# Altium PCB Battery protector.PcbDoc
Units mm, origin at the board's own origin, x right, y up, seen from the top; angles counter-clockwise.
Board outline 17.78 x 31.75 mm, 2 copper layers (Top Layer, Bottom Layer); 9 components, 8 nets, 46 pads, 43 vias.
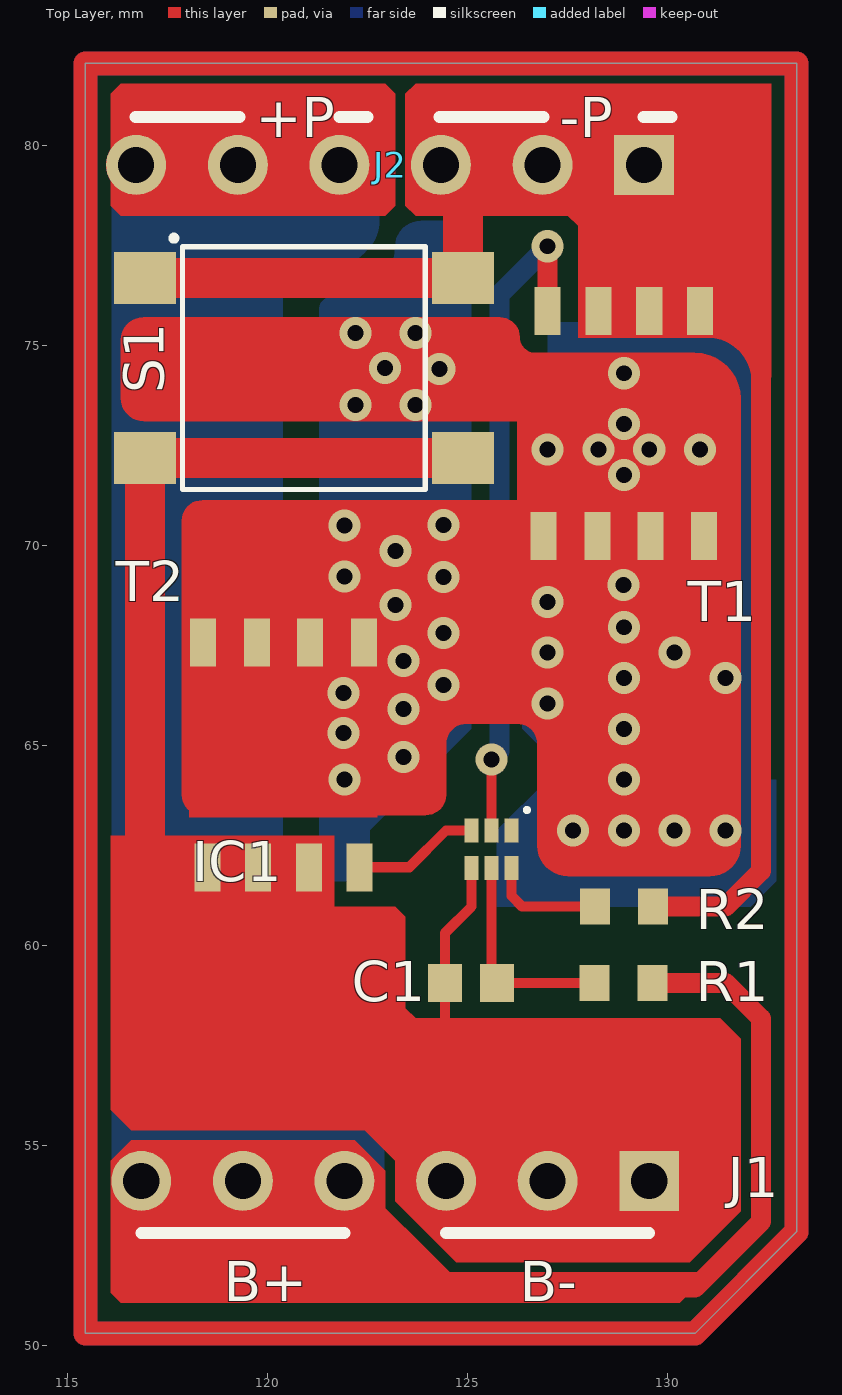
[diagram p0: Top Layer view]
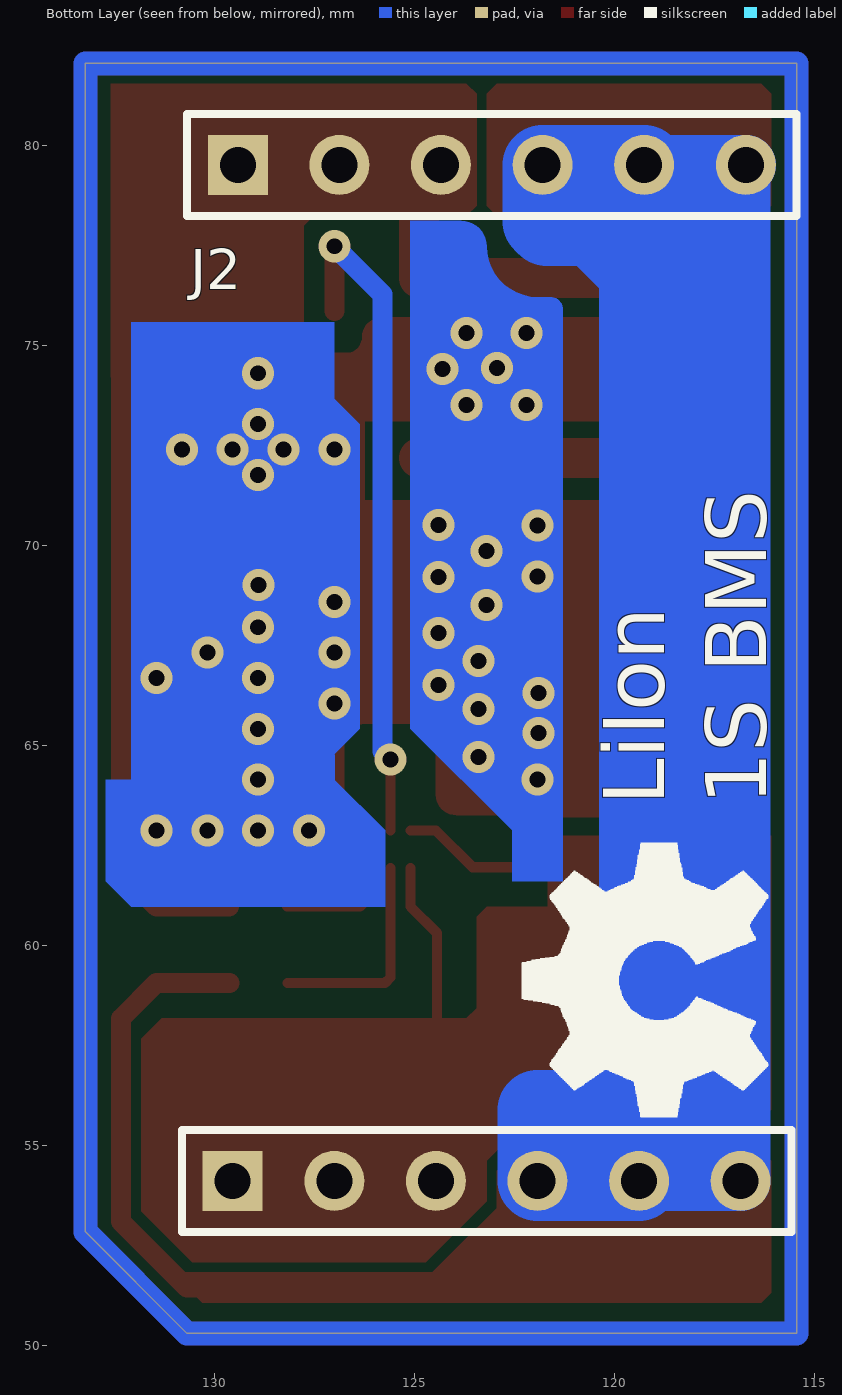
[diagram p1: Bottom Layer view, seen from below]
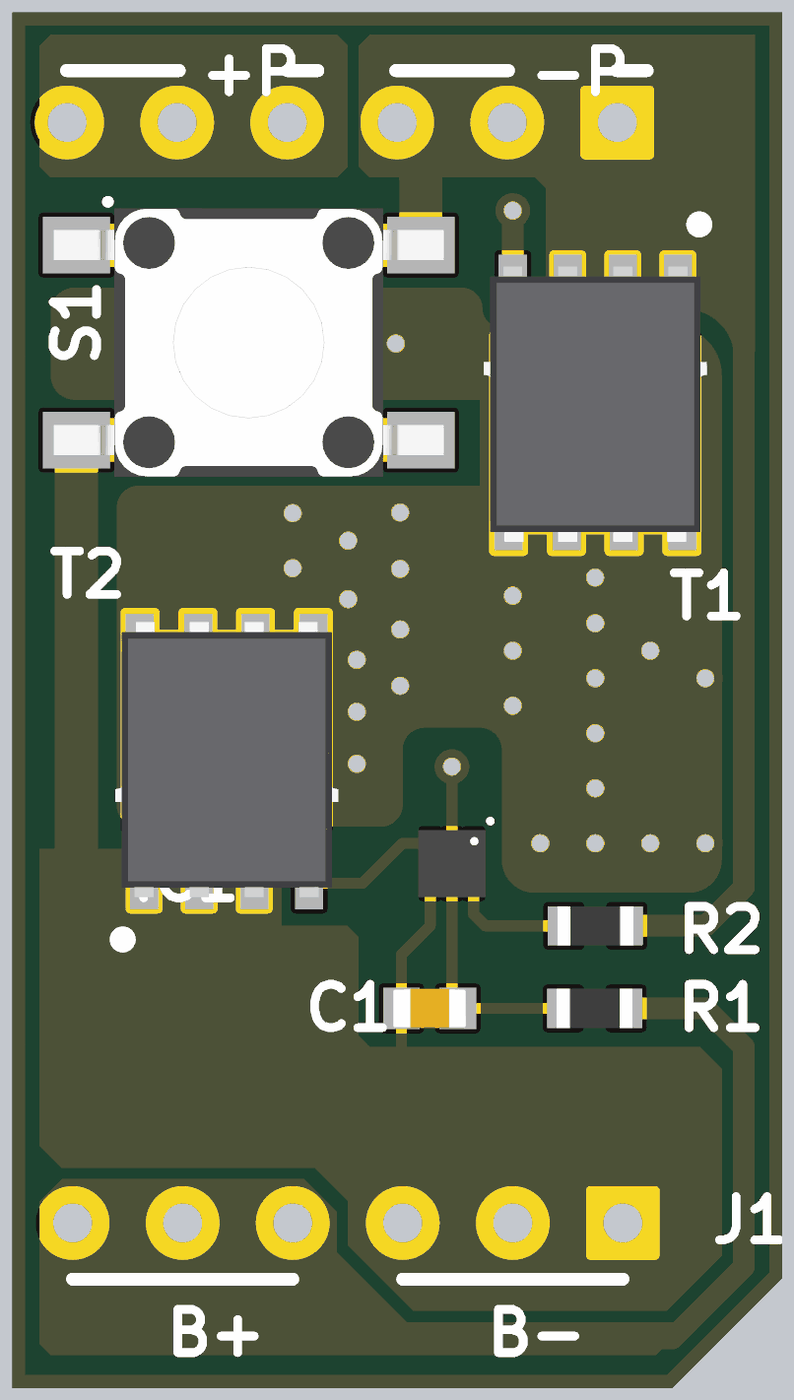
[diagram p2: 3D render of the assembled board from above, using the file's embedded part models]

## Layer stack, top to bottom
Top Solder: solder mask 0.0102, Solder Resist, Dk 3.5
Top Layer: signal copper 0.0356
Dielectric 1: dielectric 0.32, FR-4, Dk 4.8
Bottom Layer: signal copper 0.0356
Bottom Solder: solder mask 0.0102, Solder Resist, Dk 3.5

## Board outline
115.443,50.292 130.683,50.292 133.223,52.832 133.223,82.042 115.443,82.042

## Design rules (kind name [scope] priority, off if disabled: settings)
Clearance [All] p1: gap=0.2 ignorepadtopadclearanceinfootprint=FALSE
PolygonConnect [All] p1: connectstyle=Relief reliefconductorwidth=0.254 reliefentries=4 polygonreliefangle="90 Angle" airgapwidth=0.254
RoutingVias [All] p1: holewidth=0.4 width=0.8 viastyle="Through Hole" minholewidth=0.3 minwidth=0.6 maxholewidth=0.711 maxwidth=3
SolderMaskExpansion [All] p1: expansion=0.102
Width [All] p1: maxlimit=10 minlimit=0.2 preferedwidth=0.254 minimp=50.000000 maximp=50.000000 favimp=50.000000
30 further rules are at their usual default settings.

## Components (designator, comment, footprint, x,y, rotation, side; value= is the part's Value field where it differs from the comment)
C1 "Capacitor" "0603 cap" 125.08,59.055 r0 top
IC1 "BQ2970" PWSON-6 125.595,62.395 r270 top
J1 "Protect_IN" HDR1X6 129.54,54.102 r180 top
J2 "Protect_OUT" HDR1X6 129.413,79.502 r180 top
R1 "Resistor generic" "0603 RES" 128.89,59.055 r0 top
R2 "Resistor generic" "0603 RES" 128.905,60.96 r180 top
S1 "430152043826" 4301x20438x6 120.904,74.422 r0 top
T1 "MOSFET-N" TDSON-8 128.905,73.025 r180 top
T2 "MOSFET-N" TDSON-8 120.396,64.77 r0 top

## Footprints (in the part's own frame and the unit in brackets; to place one, negate y for a bottom-side part, rotate by r counter-clockwise, add the part's x,y. Pads: shape width x height; smd on the part's side, far side on the other; paste and mask are expansions set on the pad)
"0603 cap" [mm]
  rect 0.85x0.95 smd: 1(-0.65,0) 2(0.65,0)
  body extent -0.85,-0.45 0.85,0.45, height 0.8
"0603 RES" [mm] "RES0603 medium"
  rect 0.75x0.9 smd: 1(-0.725,0) 2(0.725,0)
  body extent -0.87,-0.45 0.87,0.45, height 0.4
4301x20438x6 [mm] "6*6mm vertical type, SMD, height 4.3mm, black actuator, 160gf, T&R"
  rect 1.55x1.3 smd: 1(-3.975,2.25) 2(-3.975,-2.25) 3(3.975,2.25) 4(3.975,-2.25)
  silkscreen extent -3.29,-3.04 3.04,3.29, body extent -4.5,-3.1 4.5,3.1, height 4.29
HDR1X6 [mm] "Connector; Header; 6 Position"
  rect 1.5x1.5 hole 0.9: 1(0,0)
  round 1.5 hole 0.9: 2(2.54,0) 3(5.08,0) 4(7.62,0) 5(10.16,0) 6(12.7,0)
PWSON-6 [mm] "PSON, 6-Leads, Body 1,50x1,50mm, Pitch 0,50mm, IPC Medium Density"
  rect 0.6x0.35 smd: 1(-0.47,0.5) 2(-0.47,0) 3(-0.47,-0.5) 4(0.47,-0.5) 5(0.47,0) 6(0.47,0.5)
  silkscreen extent -1.03,0.84 -0.93,0.94, body extent -0.78,-0.77 0.78,0.77, height 0.8
TDSON-8 [mm] "Mosfet TDSON 8-pin"
  rect 0.65x1.2 smd: 1(-1.905,-2.825) 1(-0.635,-2.825) 1(0.635,-2.825) 2(1.905,-2.825) 3(-2.007,2.794) 3(-0.66,2.794) 3(0.66,2.794) 3(2.007,2.794)
  round 0.6 on Top Overlay: ""(-2.4,-4.125)
  Top Layer region: 0.315,2.925 1.015,2.925 1.015,3.425 0.315,3.425
  Top Layer region: -1.015,2.925 -0.315,2.925 -0.315,3.425 -1.015,3.425
  Top Layer region: 1.65,2.925 2.35,2.925 2.35,3.425 1.65,3.425
  Top Layer region: -2.35,2.925 -1.65,2.925 -1.65,3.425 -2.35,3.425
  Top Layer region: -2.35,2.925 -2.35,-1.575 2.35,-1.575 2.35,2.925
  body extent -2.58,-3.15 2.57,3.2, height 1.1

## Part data
C1: library part "Capacitor NP", Valve=100nF
IC1: "Battery protection IC"
J1 J2: library part "Header 6", "Header, 6-Pin", LatestRevisionDate=17-Jul-2002, LatestRevisionNote="Re-released for DXP Platform.", Publisher="Altium Limited"
R1 R2: library part Resistor, "Resistor SMD"
  R1: Valve=330
  R2: Valve=2k2
S1: library part "WS-TASV, 430152043826", "WS-TASV 6x6 mm SMD", Manufacturer="Wurth Elektronik", ComponentLink1Description=Manufacturer, ComponentLink1URL=http://www.we-online.de, ComponentLink2Description=Datasheet, ComponentLink2URL=http://katalog.we-online.de/em/datasheet/4301x2xxx8x6.pdf, Created by="Baojun Chen", Created Date=Dec.2015, partNo=430152043826
T1 T2: "MOSFET N", Valve=SI7157DP-T1-GE3

## Via types
v1: diameter 0.8, hole 0.4, Top Layer to Bottom Layer, tented both sides, 43 vias

## Nets (pads, with @x,y where several pads share a name; then routed paths per layer and width w, separated by ;. In a path a pad name is that pad's centre, name@x,y a point inside that pad or via, vN(x,y) a via of type N, cw(c..) or ccw(c..) an arc to the next point about the centre after c; other vN are vias at no path point)
COOL: T1.3 T2.3
  other v1: 127.635,62.865 128.905,62.865 130.175,62.865 131.445,62.865 121.92,64.135 128.905,64.135 123.4,64.7 121.9,65.3 128.905,65.405 123.4,65.9 127,66.04 121.9,66.3 124.4,66.5 128.905,66.675 131.445,66.675 123.4,67.1 127,67.31 130.175,67.31 124.4,67.8 128.905,67.945 123.2,68.5 127,68.58 128.9,69 124.4,69.2 121.92,69.215 123.2,69.85 121.92,70.485 124.4,70.5 128.905,71.755 127,72.39 128.27,72.39 129.54,72.39 130.81,72.39 128.905,73.025 122.2,73.5 123.7,73.5 128.905,74.295 124.3,74.4 122.928,74.422 122.2,75.3 123.7,75.3
GND_BAT: C1.1 IC1.4 J1.1 J1.2 J1.3 S1.2 S1.4 T2.1 | length 42.9
  Top Layer w0.254: 118.11,61.945 118.491,61.945 119.761,61.945 120.65,61.945 120.65,57.785 121.92,56.515 124.43,56.515 ; J1.3 124.43,54.132 124.43,56.515 ; IC1.4 125.095,60.96 124.43,60.295 C1.1 124.43,56.515
  Top Layer w1: 116.84,61.468 ccw(c116.625,61.683) 116.929,61.683 S1.2 S1.4
  Top Layer w1.5: J1.3 J1.2 J1.1
GND_SYS: J2.1 J2.2 J2.3 R2.1 S1.1 S1.3 T1.1 | length 31.7
  Top Layer w0.5: T1.1@128.27,75.85 129.54,75.85 130.81,75.85 131.795,75.85 132.334,75.311 132.334,61.849 131.445,60.96 R2.1
  Top Layer w1: S1.1 S1.3 124.879,78.184 ccw(c123.015,78.184) J2.3
NetC1_2: C1.2 IC1.5 R1.1 | length 5.4
  Top Layer w0.254: IC1.5 125.595,59.19 C1.2 R1.1
NetIC1_2: IC1.2 T1.2 | length 16.8
  Top Layer w0.254: IC1.2 v1(125.595,64.635)
  Top Layer w0.5: T1.2 v1(127,77.47)
  Bottom Layer w0.254: v1(125.595,64.635) v1@125.73,64.77
  Bottom Layer w0.5: v1@125.73,64.77 125.8,64.84 125.8,76.27 v1(127,77.47)
NetIC1_3: IC1.3 T2.2 | length 3.2
  Top Layer w0.254: T2.2 123.54,61.945 124.46,62.865 IC1.3
NetIC1_6: IC1.6 R2.2 | length 2.9
  Top Layer w0.254: IC1.6 126.095,61.23 126.365,60.96 R2.2
VCC_BAT: J1.4 J1.5 J1.6 J2.4 J2.5 J2.6 R1.2 | length 137.5
  Top Layer w0.254: J1.6@116.713,54.229 J1.6
  Top Layer w0.5: J1.4 124.587,51.435 130.683,51.435 132.334,53.086 132.334,58.166 131.445,59.055 R1.2
  Top Layer w1.5: J2.6 J2.5 J2.4 ; J1.6 J1.5 J1.4
  Bottom Layer w1.5: J2.5 J2.6 116.84,79.375 J1.6 J1.5
  Bottom Layer w2: 118.11,55.372 119.38,55.372 ; 118.11,55.372 J1.5 ; 118.11,55.372 118.11,58.42 ; 118.11,58.42 119.38,57.15 ; 118.11,58.42 118.11,75.565 ; 118.11,75.565 118.11,78.359 ; 118.11,75.565 119.38,76.835 ; 118.11,78.359 118.491,77.978 119.38,77.978 ; 118.11,78.359 J2.5 ; J2.5 J2.4 121.793,78.085 121.686,77.978 120.523,77.978 ; J2.5 119.38,79.375 119.38,77.978 ; J1.5 J1.4 121.92,55.88 ; J1.5 119.38,55.372 ; 119.38,55.372 121.412,55.372 121.92,55.88 ; 119.38,55.372 119.38,57.15 ; 119.38,57.15 119.38,76.835 ; 119.38,57.15 120.65,55.88 121.92,55.88 ; 119.38,76.835 119.38,77.978 ; 119.38,76.835 120.523,77.978 ; 119.38,77.978 120.523,77.978
pads on no net: IC1.1 T1. T2.

## Polygon pours and split planes (outlines as drawn)
COOL on Bottom Layer "NONET_L02_P000" (solid, remove dead copper, shelved, pour order 0): 115.443,50.292 130.683,50.292 133.223,52.832 133.223,82.042 115.443,82.042

## Other copper
Top Layer:
  region net GND_BAT: 121.666,62.738 116.078,62.738 116.078,55.88 116.586,55.372 122.428,55.372 123.19,54.61 123.19,53.594 124.714,52.07 130.556,52.07 131.826,53.34 131.826,57.658 131.318,58.166 121.666,58.166
  region net VCC_BAT: 116.078,78.486 116.332,78.232 122.936,78.232 123.19,78.486 123.19,81.28 122.936,81.534 116.332,81.534 116.078,81.28
  region net GND_BAT: 123.444,57.912 123.444,60.706 123.19,60.96 120.904,60.96 120.904,58.166 121.158,57.912
  region net GND_BAT: 123.444,58.42 123.698,58.166 123.444,58.166
  region net VCC_BAT: 116.586,55.118 116.078,54.61 116.078,51.308 116.332,51.054 130.302,51.054 131.064,51.816 124.206,51.816 122.936,53.086 122.936,54.356 122.174,55.118
  region net GND_SYS: 131,75.184 cw(c131,74.077) 132.1,74.2 132.588,74.2 132.588,81.534 123.698,81.534 123.444,81.28 123.444,78.486 123.698,78.232 127.508,78.232 127.762,77.978 127.762,75.184
  region net COOL: 118.364,71.12 126.238,71.12 126.238,73.1 116.9,73.1 cw(c116.9,73.668) 116.332,73.668 116.332,75.132 cw(c116.892,75.132) 116.892,75.692 124.2,75.692 125.811,75.692 cw(c125.811,75.202) 126.301,75.201 ccw(c126.7,75.201) 126.7,74.803 130.683,74.803 cw(c130.683,73.66) 131.826,73.66 131.826,62.484 cw(c131.065,62.483) 131.064,61.722 127.508,61.722 cw(c127.508,62.484) 126.746,62.484 126.746,65.024 ccw(c126.238,65.024) 126.238,65.532 124.968,65.532 ccw(c124.968,65.024) 124.46,65.024 124.46,63.754 cw(c123.952,63.754) 123.952,63.246 118.364,63.246 cw(c118.364,63.754) 117.856,63.754 117.856,70.612 cw(c118.364,70.612)
Bottom Layer:
  region net COOL: 132.08,62.865 132.08,75.565 127,75.565 127,73.66 126.363,73.023 126.363,65.407 127,64.77 126.992,64.762 126.992,62.738
  region net COOL: 125.73,60.96 132.08,60.96 132.715,61.595 132.715,64.135 127,64.135 125.73,62.865
  region net COOL: 122.555,61.595 122.555,62.865 125.095,65.405 125.095,78.105 123.825,78.105 ccw(c123.825,77.47) 123.19,77.47 cw(c121.92,77.47) 121.92,76.2 121.6,76.2 ccw(c121.6,75.885) 121.285,75.885 121.285,61.595
Multi-Layer:
  the board outline again, w0.6

## Silkscreen, mask and mechanical layers (free items; w line width, h text height)
Top Overlay:
  lines w0.3: 116.7,80.7 119.3,80.7 ; 116.84,52.805 121.92,52.805 ; 121.8,80.7 122.5,80.7 ; 124.3,80.7 126.9,80.7 ; 124.46,52.805 129.54,52.805 ; 129.4,80.7 130.1,80.7
  text "+P" at 119.7,80.2 h1
  text "-P" at 127.3,80.2 h1
  text "B+" at 118.9,51.1 h1
  text "B-" at 126.3,51.1 h1
Bottom Overlay:
  region: 1925 vertices and 0 holes, not listed, extent 116.15,55.689 122.315,62.553
  text "1S BMS" at 116.205,63.5 h1.52 r270
  text "LiIon" at 118.745,63.5 h1.52 r270